# Altium PCB Science.PcbDoc (part 2 of 2)
Units mil, origin at the board's own origin, x right, y up, seen from the top; angles counter-clockwise.
Board outline 8250 x 3500 mil, 2 copper layers (Top Layer, Bottom Layer); 137 components, 126 nets, 701 pads, 227 vias.
Unrouted connection lines stored in the file: 22.
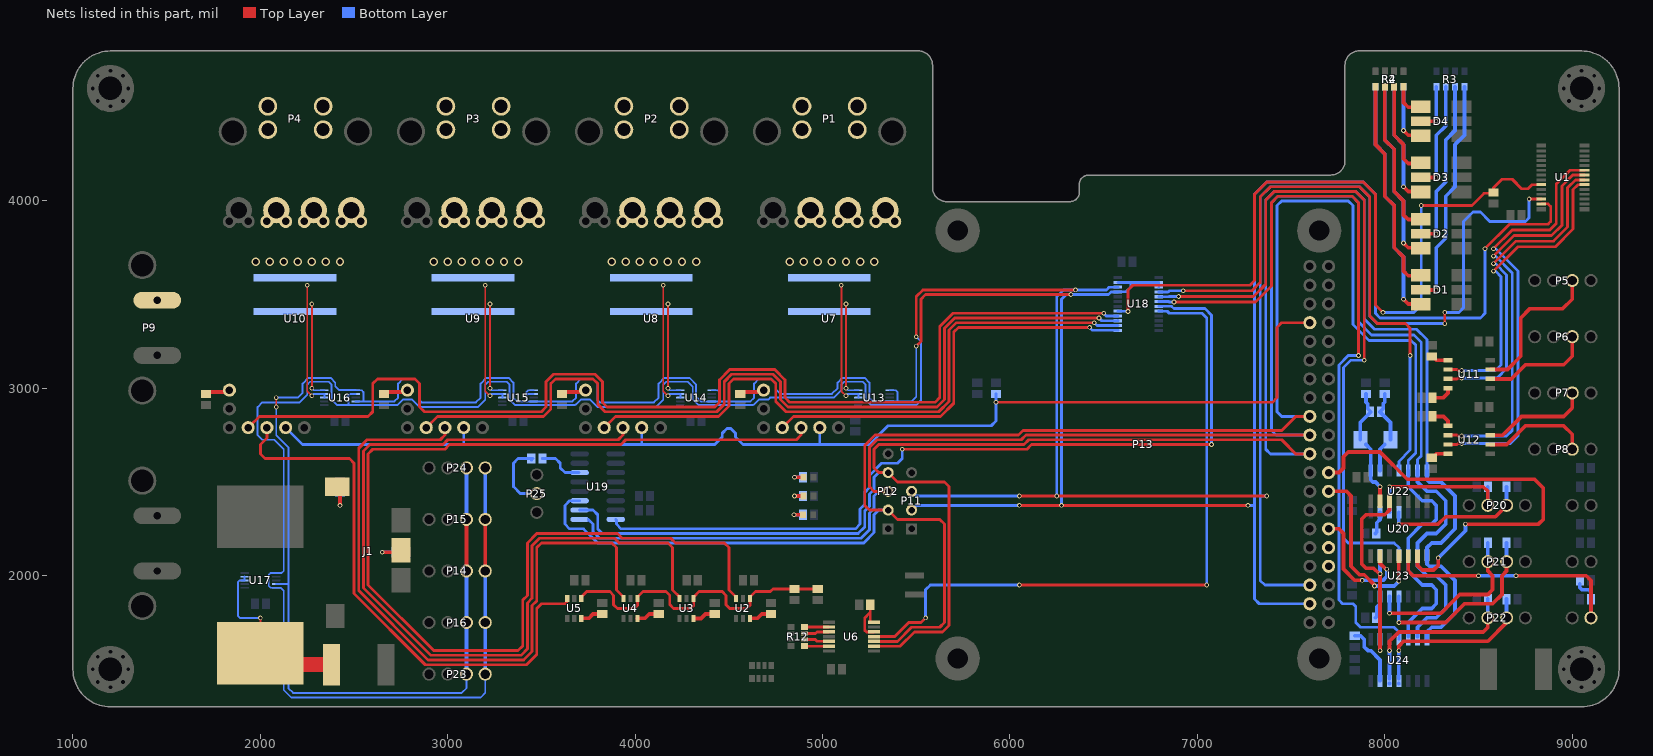
[diagram p2: the nets of this part, all layers, seen from the top]

## Via types
v1: diameter 25, hole 15, Top Layer to Bottom Layer, 184 vias
v2: diameter 45, hole 29, Top Layer to Bottom Layer, 28 vias
v3: diameter 45, hole 30, Top Layer to Bottom Layer, 11 vias
v4: diameter 25, hole 15, Top Layer to Bottom Layer, tented both sides, 2 vias
v5: diameter 70, hole 40, Top Layer to Bottom Layer, 1 vias
v6: diameter 45, hole 30, Top Layer to Bottom Layer, tented both sides, 1 vias

## Nets (pads, with @x,y where several pads share a name; then routed paths per layer and width w, separated by ;. In a path a pad name is that pad's centre, name@x,y a point inside that pad or via, vN(x,y) a via of type N, cw(c..) or ccw(c..) an arc to the next point about the centre after c; other vN are vias at no path point) (continued)
NetC19_2: C19.2 P19.2 R36.2 U20.5 | length 1472
  Top Layer w20: U20.5@8125,2075 8125,2025 8150,2000 v1(8500,2000) ; v1(8700,2000) 9075,2000 9100,1975 P19.2@9100,1775
  Bottom Layer w20: v1(8500,2000) v1(8700,2000) ; R36.2@9040,1955 9040,1936.72 9051.72,1925 9088.28,1925 9100,1913.28 C19.2@9100,1875 P19.2@9100,1775
NetC20_2: C20.2 R37.1 U22.2 Y1.2 | length 428
  Bottom Layer w20: U22.2@7975,2561.22 7975,2675 Y1.2@8000,2700 ; C20.2@8000,2970.47 8000,2925 7991.18,2916.18 7991.18,2891.18 7975,2875 7975,2873.62 8030.71,2817.91 Y1.2@8030.71,2725
NetC21_2: C21.2 R37.2 U20.13 U22.1 Y1.1 | length 617.8
  Top Layer w20: U20.13@7975,2400 v1(7975,2475)
  Bottom Layer w20: Y1.1@7869.29,2725 7869.29,2817.91 7925,2873.62 7925,2875 7908.82,2891.18 7908.82,2916.18 7900,2925 C21.2@7900,2970.47 ; Y1.1@7900,2700 7925,2675 U22.1@7925,2561.22 7925,2511.72 7936.72,2500 7950,2500 v1(7975,2475)
NetD1_4: D1.4 R2.5 | length 1106.1
  Top Layer w20: R2.5@7950,4608.66 7950,4300 8000,4250 8000,4025 8050,3975 8050,3750 8100,3700 8100,3625 8125,3600 D1.4@8150,3600
NetD1_5: D1.5 R3.5 | length 1195.8
  Top Layer w20: D1.5@8225,3525 v1(8275,3525)
  Bottom Layer w20: v1(8275,3525) 8275,3750 8325,3800 8325,4025 8375,4075 8375,4300 8425,4350 R3.5@8425,4608.66
NetD1_6: D1.6 R4.8 | length 1256.1
  Top Layer w20: v1(8100,3475) 8125,3450 D1.6@8150,3450
  Bottom Layer w20: R4.8@7950,4608.66 7950,4300 8000,4250 8000,4025 8050,3975 8050,3750 8100,3700 v1(8100,3475)
NetD2_4: D2.4 R2.6 | length 785.4
  Top Layer w20: R2.6@8000,4608.66 8000,4325 8050,4275 8050,4050 8100,4000 8100,3925 8125,3900 D2.4@8150,3900
NetD2_5: D2.5 R3.6 | length 875.1
  Top Layer w20: D2.5@8225,3825 v1(8275,3825)
  Bottom Layer w20: v1(8275,3825) 8275,4050 8325,4100 8325,4325 8375,4375 R3.6@8375,4608.66
NetD2_6: D2.6 R4.7 | length 935.4
  Top Layer w20: v1(8100,3775) 8125,3750 D2.6@8150,3750
  Bottom Layer w20: R4.7@8000,4608.66 8000,4325 8050,4275 8050,4050 8100,4000 v1(8100,3775)
NetD3_4: D3.4 R2.7 | length 464.7
  Top Layer w20: R2.7@8050,4608.66 8050,4350 8100,4300 8100,4225 8125,4200 D3.4@8150,4200
NetD3_5: D3.5 R3.7 | length 554.4
  Top Layer w20: D3.5@8225,4125 v1(8275,4125)
  Bottom Layer w20: v1(8275,4125) 8275,4350 8325,4400 R3.7@8325,4608.66
NetD3_6: D3.6 R4.6 | length 614.7
  Top Layer w20: v1(8100,4075) 8125,4050 D3.6@8150,4050
  Bottom Layer w20: R4.6@8050,4608.66 8050,4350 8100,4300 v1(8100,4075)
NetD4_4: D4.4 R2.8 | length 144
  Top Layer w20: R2.8@8100,4608.66 8100,4525 8125,4500 D4.4@8150,4500
NetD4_5: D4.5 R3.8 | length 233.7
  Top Layer w20: D4.5@8225,4425 v1(8275,4425)
  Bottom Layer w20: v1(8275,4425) R3.8@8275,4608.66
NetD4_6: D4.6 R4.5 | length 294
  Top Layer w20: v1(8100,4375) 8125,4350 D4.6@8150,4350
  Bottom Layer w20: v1(8100,4375) R4.5@8100,4608.66
NetD5_1: D5.1 R31.1 | length 100
  Top Layer w20: v1(4847.44,2325) D5.1@4894.88,2325
  Bottom Layer w20: v1(4847.44,2325) R31.1@4900,2325
NetD6_1: D6.1 R32.1 | length 97.4
  Top Layer w20: v1(4850,2425) D6.1@4897.44,2425
  Bottom Layer w20: v1(4850,2425) R32.1@4900,2425
NetD7_1: D7.1 R33.1 | length 97.4
  Top Layer w20: v1(4850,2525) D7.1@4897.44,2525
  Bottom Layer w20: v1(4850,2525) R33.1@4900,2525
NetF1_2: F1.2 R30.1 U17.8 U17.9 | length 796.1
  Top Layer w10: R30.1@2000,1745 v1(2000,1775)
  Top Layer w80: R30.1@2000,1585.83 2060.83,1525 F1.2@2375,1525
  Bottom Layer w10: U17.9@1915,1995 1915,1975.08 1915.08,1975 U17.8@1916.34,1975 1916.26,1974.92 1889.92,1974.92 1880,1965 1880,1785 1890,1775 v1(2000,1775)
NetJ1_1: J1.1 R28.2 | length 145.5
  Top Layer w20: v1(2425,2375) J1.1@2425,2450
  Bottom Layer w20: v1(2425,2375) R28.2@2425,2445.47
NetJ1_4: J1.4 R29.2 | length 145.5
  Top Layer w20: v1(2650,2125) J1.4@2725,2125
  Bottom Layer w20: v1(2650,2125) R29.2@2720.47,2125
NetP1_1: P1.1 U7.15
NetP1_2: P1.2 U7.14
NetP2_1: P2.1 U8.15
NetP2_2: P2.2 U8.14
NetP3_1: P3.1 U9.15
NetP3_2: P3.2 U9.14
NetP4_1: P4.1 U10.15
NetP4_2: P4.2 U10.14
NetP5_3: P5.3 U11.7 | length 812.9
  Top Layer w20: U11.7@8562.2,3100 8654.53,3100 8725,3170.47 8725,3375 8775,3425 8950,3425 9000,3475 P5.3@9000,3575
NetP6_3: P6.3 U11.6 | length 592.2
  Top Layer w20: U11.6@8562.2,3050 8675,3050 8750,3125 8954.53,3125 9000,3170.47 P6.3@9000,3275
NetP7_3: P7.3 U12.7 | length 577.6
  Top Layer w20: U12.7@8562.2,2750 8629.53,2750 8729.53,2850 8954.53,2850 9000,2895.47 P7.3@9000,2975
NetP8_3: P8.3 U12.6 | length 577.4
  Top Layer w20: U12.6@8562.2,2700 8650.24,2700 8750.24,2800 8954.17,2800 9000,2754.17 P8.3@9000,2675
NetP9_2: P9.2 R24.2 R25.2 R26.2 R27.2 U13.10 U14.10 U15.10 U16.10 | length 2083
  Top Layer w10: v1(2275,3000) v1(2275,3450) ; v1(3225,3000) v1(3225,3450) ; v1(4175,3000) v1(4175,3450) ; v1(5125,3000) v1(5125,3450)
  Bottom Layer w10: v1(2275,3000) 2285.63,2989.37 U16.10@2341.34,2989.37 ; v1(3225,3000) 3235.63,2989.37 U15.10@3291.34,2989.37 ; v1(4175,3000) 4185.63,2989.37 U14.10@4241.34,2989.37 ; v1(5125,3000) 5135.63,2989.37 U13.10@5191.34,2989.37
NetP20_2: P20.2 R41.1 U22.12 | length 835.4
  Top Layer w20: v1(8025,2475) 8525,2475 8550,2450 P20.2@8550,2375
  Bottom Layer w20: U22.12@8025,2350 v1(8025,2475) ; P20.2@8550,2375 R41.1@8550,2475
NetP20_3: P20.3 R44.1 U22.11 | length 780.2
  Top Layer w20: v1(8075,2275) 8285,2275 8325,2315 8590,2315 P20.3@8650,2375
  Bottom Layer w20: v1(8075,2275) U22.11@8075,2338.78 ; P20.3@8650,2375 R44.1@8650,2475
NetP21_2: P21.2 R42.1 U23.12 | length 950.9
  Top Layer w20: v1(8025,1800) 8300,1800 8400,1900 8550,1900 8575,1925 8575,2000 8550,2025 P21.2@8550,2075
  Bottom Layer w20: v1(8025,1800) U23.12@8025,1888.78 ; P21.2@8550,2075 R42.1@8550,2175
NetP21_3: P21.3 R45.1 U23.11 | length 1036.3
  Top Layer w20: v1(8075,1750) 8325,1750 8425,1850 8575,1850 8625,1900 8625,2000 8650,2025 P21.3@8650,2075
  Bottom Layer w20: v1(8075,1750) U23.11@8075,1888.78 ; P21.3@8650,2075 R45.1@8650,2175
NetP22_2: P22.2 R43.1 U24.12 | length 906.1
  Top Layer w20: v1(8025,1600) 8025,1650 8075,1700 8525,1700 8550,1725 P22.2@8550,1775
  Bottom Layer w20: U24.12@8025,1450 v1(8025,1600) ; P22.2@8550,1775 R43.1@8550,1875
NetP22_3: P22.3 R46.1 U24.11 | length 926.8
  Top Layer w20: v1(8075,1600) 8075,1625 8100,1650 8550,1650 8650,1750 P22.3@8650,1775
  Bottom Layer w20: U24.11@8075,1450 v1(8075,1600) ; P22.3@8650,1775 R46.1@8650,1875
NetP25_2: P25.2 R47.2 | length 388.5
  Bottom Layer w15: R47.2@3445.47,2615.95 R47.2@3454.53,2625 ; R47.2@3450,2625 3375,2625 3350,2600 3350,2475 3387,2438 P25.2@3475,2438
NetR1_2: R1.2 U1.23 U18.17 | length 4154.6
  Top Layer w15: v1(6630,3410) 6630,3525 6655,3550 7280,3550 7305,3575 7305,4035 7370,4100 7885,4100 7950,4035 7950,3445 v1(7990,3405) ; v1(8195,3975) 8464.78,3975 8529.94,4040.16 8575.63,4040.16 R1.2@8580,4044.53 ; R1.2@8580,4055 8580,4070 8625,4115 8680,4115 8730,4065 8764.53,4065 8785.77,4086.24 8834.47,4086.24 U1.23@8834.84,4086.61
  Bottom Layer w15: U18.17@6575.75,3411.61 6576.52,3410.85 6629.15,3410.85 v1(6630,3410) ; v1(7990,3405) 8155,3405 8195,3445 v1(8195,3975)
NetR5_1: R5.1 U2.3 | length 122.5
  Top Layer w20: U2.3@4612.4,1771.85 4612.4,1772.4 4613.23,1773.23 4653.23,1773.23 4675,1795 R5.1@4725,1795
NetR6_1: R6.1 U3.3 | length 122.2
  Top Layer w20: U3.3@4312.4,1771.85 4351.85,1771.85 4375,1795 R6.1@4425,1795
NetR7_1: R7.1 U4.3 | length 132.5
  Top Layer w20: U4.3@4012.4,1771.85 4012.4,1772.4 4013.23,1773.23 4053.23,1773.23 4075,1795 R7.1@4135,1795
NetR8_1: R8.1 U5.3 | length 122.5
  Top Layer w20: U5.3@3712.4,1771.85 3712.4,1772.4 3713.23,1773.23 3753.23,1773.23 3775,1795 R8.1@3825,1795
NetR9_2: R9.2 R11.1 U2.4 U3.4 U4.4 U5.4 | length 1653.1
  Top Layer w15: U5.4@3712.4,1878.15 3712.4,1886.02 3741.38,1915 3865,1915 3885,1895 3885,1845 3905,1825 3995,1825 4012.4,1842.4 U4.4@4012.4,1878.15 ; U4.4@4012.4,1886.02 4041.38,1915 4165,1915 4185,1895 4185,1845 4205,1825 4295,1825 4312.4,1842.4 U3.4@4312.4,1878.15 ; U3.4@4312.4,1886.02 4341.38,1915 4465,1915 4485,1895 4485,1845 4505,1825 4595,1825 4612.4,1842.4 U2.4@4612.4,1878.15 ; U2.4@4612.4,1886.02 4641.38,1915 4720.47,1915 4735,1929.53 R11.1@4850,1929.53 R9.2@4975,1929.53
NetR10_1: R10.1 U6.12 U6.14 | length 250.1
  Top Layer w15: 5250,1800 5225,1775 5225,1708.79 5233.79,1700 5273.12,1700 U6.12@5273.71,1700.59 ; R10.1@5250,1825 5254.15,1825 5254.53,1824.63 5254.53,1753.13 5255.89,1751.77 U6.14@5273.71,1751.77
NetR12_5: R12.5 U6.6 | length 129
  Top Layer w15: R12.5@4905,1625 4906.18,1623.82 U6.6@5033.55,1623.82
NetR12_6: R12.6 U6.5 | length 133.5
  Top Layer w15: R12.6@4905,1657.07 4907.19,1659.25 4960.75,1659.25 4969.82,1650.18 5032.79,1650.18 U6.5@5033.55,1649.41
NetR12_7: R12.7 U6.3 | length 133.5
  Top Layer w15: R12.7@4905,1692.93 4907.18,1690.75 4960.75,1690.75 4969.82,1699.82 5032.78,1699.82 U6.3@5033.55,1700.59
NetR12_8: R12.8 U6.2 | length 129
  Top Layer w15: R12.8@4905,1725 4905.41,1725.41 5032.79,1725.41 U6.2@5033.55,1726.18
NetR14_1: R14.1 U7.10 | length 121.8
  Top Layer w20: R14.1@4560,2969.53 4570.9,2980.43 4669.57,2980.43 U7.10@4675,2975
NetR15_1: R15.1 U8.10 | length 121.8
  Top Layer w20: R15.1@3610,2969.53 3620.91,2980.43 3719.57,2980.43 U8.10@3725,2975
NetR16_1: R16.1 U9.10 | length 121.8
  Top Layer w20: R16.1@2660,2969.53 2670.91,2980.43 2769.57,2980.43 U9.10@2775,2975
NetR19_1: R19.1 U10.10 | length 121.8
  Top Layer w20: R19.1@1710,2969.53 1720.9,2980.43 1819.57,2980.43 U10.10@1825,2975
NetR20_2: R20.2 U11.1 | length 96.3
  Top Layer w20: R20.2@8250,3170.47 8255.91,3170.47 8276.38,3150 U11.1@8337.8,3150
NetR21_2: R21.2 U11.4 | length 118.6
  Top Layer w20: R21.2@8254.53,2950 8312.8,2950 8337.8,2975 U11.4@8337.8,3000
NetR22_2: R22.2 U12.1 | length 118.6
  Top Layer w20: R22.2@8254.53,2850 8312.8,2850 8337.8,2825 U12.1@8337.8,2800
NetR23_2: R23.2 U12.4 | length 96.3
  Top Layer w20: R23.2@8250,2629.53 8255.91,2629.53 8276.38,2650 U12.4@8337.8,2650
NetR24_1: R24.1 U7.16 U13.8 U13.9 | length 690.3
  Top Layer w10: v1(5100,3550) 5100,2985 v1(5125,2960)
  Bottom Layer w10: v1(5125,2960) 5134.69,2969.69 U13.9@5191.34,2969.69 U13.8@5191.34,2950.08
  other v2: 4825,3675 4900,3675 4975,3675 5050,3675 5125,3675 5200,3675 5275,3675
NetR25_1: R25.1 U8.16 U14.8 U14.9 | length 690.3
  Top Layer w10: v1(4150,3550) 4150,2985 v1(4175,2960)
  Bottom Layer w10: v1(4175,2960) 4184.69,2969.69 U14.9@4241.34,2969.69 U14.8@4241.34,2950.08
  other v2: 3875,3675 3950,3675 4025,3675 4100,3675 4175,3675 4250,3675 4325,3675
NetR26_1: R26.1 U9.16 U15.8 U15.9 | length 690.3
  Top Layer w10: v1(3200,3550) 3200,2985 v1(3225,2960)
  Bottom Layer w10: v1(3225,2960) 3234.69,2969.69 U15.9@3291.34,2969.69 U15.8@3291.34,2950.08
  other v2: 2925,3675 3000,3675 3075,3675 3150,3675 3225,3675 3300,3675 3375,3675
NetR27_1: R27.1 U10.16 U16.8 U16.9 | length 690.3
  Top Layer w10: v1(2250,3550) 2250,2985 v1(2275,2960)
  Bottom Layer w10: v1(2275,2960) 2284.69,2969.69 U16.9@2341.34,2969.69 U16.8@2341.34,2950.08
  other v2: 1975,3675 2050,3675 2125,3675 2200,3675 2275,3675 2350,3675 2425,3675
NetR38_2: R38.2 U22.13 | length 124.1
  Bottom Layer w20: R38.2@7950,2225 7957.56,2232.56 7957.56,2282.56 7975,2300 U22.13@7975,2338.78
NetR39_2: R39.2 U23.13 | length 124.1
  Bottom Layer w20: R39.2@7950,1775 7957.56,1782.56 7957.56,1832.56 7975,1850 U23.13@7975,1888.78
NetR40_2: R40.2 U24.13 | length 323.7
  Bottom Layer w20: R40.2@7840,1679.53 7840.47,1680 7870,1680 7890,1660 7890,1620 7910,1600 7925,1600 7975,1550 U24.13@7975,1438.78
NetR47_1: R47.1 U19.6 | length 241.2
  Bottom Layer w15: R47.1@3504.53,2625 3575,2625 3600,2600 3600,2575 3625,2550 U19.6@3700,2550
NetU1_6: U1.6 U11.2 | length 1618.5
  Top Layer w15: U11.2@8337.8,3100 8385,3100 8390,3095 v1(8410,3095) ; v1(8580,3625) 8710,3755 8910,3755 9005,3850 9005,4060 9031.24,4086.24 9064.78,4086.24 U1.6@9065.16,4086.61
  Bottom Layer w15: v1(8410,3095) 8590,3095 8620,3125 8620,3595 8590,3625 v1(8580,3625)
NetU1_7: U1.7 U11.3 | length 1723.2
  Top Layer w15: U11.3@8337.8,3050 8385,3050 8390,3055 v1(8410,3055) ; v1(8580,3665) 8700,3785 8900,3785 8975,3860 8975,4070 9016.83,4111.83 9064.78,4111.83 U1.7@9065.16,4112.21
  Bottom Layer w15: v1(8410,3055) 8600,3055 8650,3105 8650,3605 8590,3665 v1(8580,3665)
NetU1_8: U1.8 U12.2 | length 2121.4
  Top Layer w15: U12.2@8337.8,2750 8385,2750 8390,2745 v1(8410,2745) ; v1(8580,3705) 8690,3815 8890,3815 8945,3870 8945,4080 9002.8,4137.8 U1.8@9065.16,4137.8
  Bottom Layer w15: v1(8410,2745) 8650,2745 8680,2775 8680,3615 8590,3705 v1(8580,3705)
NetU1_9: U1.9 U12.3 | length 2232
  Top Layer w15: U12.3@8337.8,2700 8385,2700 8390,2705 v1(8410,2705) ; v1(8580,3745) 8680,3845 8880,3845 8915,3880 8915,4090 8988.39,4163.39 U1.9@9065.16,4163.39
  Bottom Layer w15: v1(8410,2705) 8670,2705 8710,2745 8710,3625 8590,3745 v1(8580,3745)
NetU2_6: U2.6 U7.3 | length 6038.4
  Top Layer w15: U2.6@4537.6,1886.02 4500,1923.62 4500,2150 4475,2175 4215,2175 4190,2200 3930,2200 3905,2225 3475,2225 3425,2175 3425,1895 3400,1870 3400,1625 3375,1600 2925,1600 2575,1950 2575,2650 2600,2675 2985,2675 3010,2700 3925,2700 3950,2725 4860,2725 4885,2750 U7.3@4885,2790
NetU3_6: U3.6 U8.3 | length 4856
  Top Layer w15: U8.3@3935,2790 3935,2750 3910,2725 3000,2725 2975,2700 2585,2700 2550,2665 2550,1935 2910,1575 3390,1575 3425,1610 3425,1855 3450,1880 3450,2160 3490,2200 3890,2200 3915,2175 4175,2175 4200,2150 4200,1923.62 U3.6@4237.6,1886.02
NetU4_6: U4.6 U9.3 | length 3684.4
  Top Layer w15: U9.3@2985,2790 2985,2750 2960,2725 2570,2725 2525,2680 2525,1920 2895,1550 3405,1550 3450,1595 3450,1840 3475,1865 3475,2150 3500,2175 3875,2175 3900,2150 3900,1923.62 3937.6,1886.02 U4.6@3937.6,1878.15
NetU5_6: U5.6 U10.3 | length 2964.8
  Top Layer w15: U10.3@2035,2790 2035,2735 2000,2700 2000,2650 2025,2625 2475,2625 2500,2600 2500,1905 2880,1525 3420,1525 3475,1580 3475,1825 3500,1850 3626.21,1850 3635,1858.79 3635,1875.55 U5.6@3637.6,1878.15
NetU6_11: U6.11 U18.8 | length 3674
  Top Layer w15: U6.11@5273.71,1675 5385,1675 5460,1750 5525,1750 v1(5550,1775) ; v1(6050,1950) v1(7050,1950)
  Bottom Layer w15: v1(5550,1775) 5550,1925 5575,1950 v1(6050,1950) ; U18.8@6794.25,3411.61 6795.02,3410.85 6839.15,3410.85 6850,3400 7025,3400 7050,3375 v1(7050,1950)
NetU7_2: U7.2 U18.13 | length 2241.5
  Top Layer w15: U7.2@4785,2790 4845,2850 5630,2850 5700,2920 5700,3300 5725,3325 v1(6425,3325)
  Bottom Layer w15: v1(6425,3325) 6440.75,3309.25 U18.13@6575.75,3309.25
NetU8_2: U8.2 U18.14 | length 3472.5
  Top Layer w15: U8.2@3835,2790 3895,2850 4445,2850 4500,2905 4500,3025 4525,3050 4725,3050 4750,3025 4750,2930 4805,2875 5620,2875 5675,2930 5675,3310 5715,3350 v1(6450,3350)
  Bottom Layer w15: v1(6450,3350) 6465.16,3334.84 U18.14@6575.75,3334.84
NetU9_2: U9.2 U18.15 | length 4722.2
  Top Layer w15: U9.2@2885,2790 2945,2850 3510,2850 3550,2890 3550,3025 3575,3050 3775,3050 3800,3025 3800,2915 3840,2875 4435,2875 4475,2915 4475,3035 4515,3075 4735,3075 4775,3035 4775,2940 4815,2900 5610,2900 5650,2940 5650,3320 5705,3375 v1(6475,3375)
  Bottom Layer w15: v1(6475,3375) 6489.57,3360.43 U18.15@6575.75,3360.43 U18.15@6574.98,3361.2
NetU10_2: U10.2 U18.16 | length 5994.2
  Top Layer w15: U10.2@1925,2800 1945,2800 1995,2850 2575,2850 2600,2875 2600,3025 2625,3050 2825,3050 2850,3025 2850,2900 2875,2875 3500,2875 3525,2900 3525,3035 3565,3075 3785,3075 3825,3035 3825,2925 3850,2900 4425,2900 4450,2925 4450,3045 4505,3100 4745,3100 4800,3045 4800,2950 4825,2925 5600,2925 5625,2950 5625,3330 5695,3400 v1(6500,3400)
  Bottom Layer w15: v1(6500,3400) 6513.98,3386.02 U18.16@6575.75,3386.02 U18.16@6574.98,3386.79
NetU18_4: U18.4 U22.4 | length 3306.6
  Top Layer w15: v1(6925,3520) 7290,3520 7335,3565 7335,4020 7390,4075 7865,4075 7920,4020 7920,3385 7960,3345 8110,3345 8135,3320 v1(8135,3175)
  Bottom Layer w15: U18.4@6794.25,3513.98 6843.98,3513.98 ; 6845,3515 6850,3520 v1(6925,3520) ; U22.4@8075,2561.22 8075,2610 8135,2670 v1(8135,3175)
NetU18_5: U18.5 U23.4 | length 3857.8
  Top Layer w15: v1(6900,3490) 7300,3490 7365,3555 7365,4005 7410,4050 7845,4050 7890,4005 v1(7890,3150)
  Bottom Layer w15: U18.5@6795.02,3489.15 U18.5@6794.25,3488.39 6848.39,3488.39 6850,3490 v1(6900,3490) ; v1(7890,3150) 7820,3150 7780,3110 7780,2200 7805,2175 8050,2175 8075,2150 U23.4@8075,2111.22
NetU18_6: U18.6 U24.4 | length 4250.8
  Top Layer w15: v1(6875,3460) 7310,3460 7395,3545 7395,3990 7430,4025 7825,4025 7860,3990 v1(7860,3175)
  Bottom Layer w15: U18.6@6794.25,3462.8 6847.2,3462.8 6850,3460 v1(6875,3460) ; v1(7860,3175) 7805,3175 7755,3125 7755,1870 7775,1850 7830,1850 7845,1835 7845,1750 7870,1725 8050,1725 8075,1700 U24.4@8075,1661.22
NetU18_7: U18.7 U19.16 | length 4540.8
  Top Layer w15: v1(5425,2675) 6090,2675 6115,2700 v1(7075,2700)
  Bottom Layer w15: U19.16@3896.46,2300 3900,2296.45 3900,2275 3925,2250 5175,2250 5200,2275 5200,2355 5225,2380 5225,2445 5250,2470 5250,2535 5315,2600 5400,2600 5425,2625 v1(5425,2675) ; U18.7@6794.25,3437.21 6862.79,3437.21 6875,3425 7040,3425 7075,3390 v1(7075,2700)
NetU20_12: U20.12 U23.2 U24.2 | length 1134.3
  Top Layer w20: v1(7975,1600) v1(7975,2010) 7970,2010 7940,2040 7900,2040 7877.5,2062.5 7877.5,2302.5 7900,2325 8000,2325 8025,2350 U20.12@8025,2396.65
  Bottom Layer w20: v1(7975,1600) U24.2@7975,1661.22 ; v1(7975,2010) U23.2@7975,2100
PI_LIM1: P13.12 U20.2 | length 669.3
  Top Layer w20: P13.12@7700,2250 7755,2250 7780,2225 7780,2035 7840,1975 v1(7880,1975) ; U20.2@7975,2103.35 7975,2065 8005,2035 v1(8010,2035)
  Bottom Layer w20: v1(7880,1975) 7990,1975 8010,1995 v1(8010,2035)
PI_LIM2: P13.16 U20.4 | length 950.5
  Top Layer w20: P13.16@7700,2450 7795,2450 7820,2425 7820,2050 7865,2005 7890,2005 7945,1950 v1(7945,1945) ; v1(8075,1970) U20.4@8075,2103.35
  Bottom Layer w20: v1(7945,1945) 8050,1945 v1(8075,1970)
PI_LIM3: P13.18 U20.6 | length 2357.9
  Top Layer w20: P13.18@7700,2550 7755,2550 7780,2575 7780,2635 7805,2660 7975,2660 8120,2515 8798.28,2515 8845,2468.28 8845,2300 8820,2275 v1(8430,2275) ; U20.6@8175,2103.35 8175,2055 8200,2030 8260,2030 8285,2055 v1(8285,2095)
  Bottom Layer w20: v1(8285,2095) 8430,2240 v1(8430,2275)
PI_MISO: P12.3 P13.21 U19.1 U22.6 U23.6 U24.6 | length 9426.6
  Top Layer w15: P12.3@5350,2450 5275,2450 5250,2475 5250,2685 5290,2725 6060,2725 6085,2750 P13.21@7600,2750
  Bottom Layer w15: U19.1@3750,2300 3775,2275 3775,2235 3810,2200 5205,2200 5250,2245 5250,2335 5275,2360 5275,2425 5300,2450 P12.3@5350,2450 ; P13.21@7600,2750 7420,2750 7395,2775 7395,3990 7430,4025 7825,4025 7860,3990 7860,3355 7930,3285 8155,3285 8195,3245 8195,2640 8175,2620 U22.6@8175,2561.22
  Bottom Layer w20: U24.6@8175,1675 8175,1725 8225,1775 8275,1775 8325,1825 8325,1950 8275,2000 8225,2000 8175,2050 U23.6@8175,2111.22 ; U23.6@8175,2125 8175,2175 8225,2225 8275,2225 8325,2275 8325,2400 8275,2450 8225,2450 8175,2500 U22.6@8175,2561.22
PI_MOSI: P12.4 P13.19 U6.9 U19.2 U22.7 U23.7 U24.7 | length 11252.7
  Top Layer w15: U6.9@5273.71,1623.82 5413.82,1623.82 5490,1700 5640,1700 5675,1735 5675,2475 5650,2500 5400,2500 P12.4@5350,2550 5300,2550 5275,2575 5275,2675 5300,2700 6075,2700 6100,2725 7450,2725 7525,2650 P13.19@7600,2650
  Bottom Layer w15: U19.2@3703.54,2350 3703.8,2349.74 3775.26,2349.74 3800,2325 3800,2250 3825,2225 5190,2225 5225,2260 5225,2345 5250,2370 5250,2435 5275,2460 5275,2525 5300,2550 P12.4@5350,2550 ; P13.19@7600,2650 7390,2650 7365,2675 7365,4005 7410,4050 7845,4050 7890,4005 7890,3370 7945,3315 8170,3315 8225,3260 U22.7@8225,2561.22
  Bottom Layer w20: U24.7@8225,1650 8225,1700 8250,1725 8300,1725 8375,1800 8375,1975 8300,2050 8236.72,2050 8225,2061.72 8225,2150 8250,2175 8300,2175 8375,2250 8375,2425 8300,2500 8236.72,2500 8225,2511.72 U22.7@8225,2561.22
PI_RX: P13.10
PI_SCK: P12.2 P13.23 U6.10 U19.3 U22.5 U23.5 U24.5 | length 10902.1
  Top Layer w15: U6.10@5273.71,1649.41 5399.41,1649.41 5475,1725 5625,1725 5650,1750 5650,2275 5625,2300 5400,2300 P12.2@5350,2350 5250,2350 5225,2375 5225,2695 5280,2750 6045,2750 6070,2775 7450,2775 7525,2850 P13.23@7600,2850
  Bottom Layer w15: U19.3@3703.54,2400 3650,2400 3625,2375 3625,2275 3650,2250 3725,2250 3800,2175 5220,2175 5275,2230 5275,2325 5300,2350 P12.2@5350,2350 ; P13.23@7600,2850 7450,2850 7425,2875 7425,3975 7450,4000 7805,4000 7830,3975 7830,3340 7915,3255 8140,3255 8165,3230 8165,2655 8125,2615 U22.5@8125,2561.22
  Bottom Layer w20: U24.5@8125,1675 8125,1750 8200,1825 8250,1825 8275,1850 8275,1925 8250,1950 8200,1950 8125,2025 U23.5@8125,2111.22 ; U23.5@8125,2125 8125,2200 8200,2275 8250,2275 8275,2300 8275,2375 8250,2400 8200,2400 8125,2475 U22.5@8125,2561.22
PI_SCL: P11.3 P13.5 P14.4 P15.4 P16.4 P23.4 P24.4 U1.26 U13.5 U14.5 U15.5 U16.2 U16.5 U17.1 U17.5 U18.22 | length 18493
  Top Layer w15: v1(5500,3275) 5500,3490 5535,3525 v1(6350,3525) ; v1(6050,2425) v1(6250,2425) v1(7370,2425) ; v1(8320,3345) v1(8320,3405) ; v1(8770,4010) 8770.16,4009.84 U1.26@8834.84,4009.84
  Top Layer w20: P14.4@3200,2025 P15.4@3200,2300
  Bottom Layer w10: 2479.31,2910.69 2508.58,2910.55 U16.5@2508.66,2910.63 2730.63,2910.63 2760,2940 2810,2940 2850,2900 3160,2900 3200,2940 3200,3020 3215,3035 3315,3035 3330,3020 3330,2940 3360,2910 U15.5@3460,2910 ; U16.2@2508.58,2969.61 2479.61,2969.61 2470,2960 2470,2910 ; U16.5@2510,2910 2470,2910 ; P23.4@3200,1475 3200,1375 3175,1350 2165,1350 2125,1390 2125,1920 2109.45,1935.55 U17.5@2083.66,1935.63 U17.5@2083.66,1935.63 2083.58,1935.71 2054.29,1935.71 2045,1945 2045,2005 2054.29,2014.29 2083.58,2014.29 U17.1@2083.66,2014.37 U17.1@2083.66,2014.37 2114.45,2014.45 2125,2025 2125,2675 2075,2725 2010,2725 1985,2750 1985,2900 2010,2925 2210,2925 2250,2965 2250,3020 2265,3035 2365,3035 2380,3020 2380,2940 2410,2910 2470,2910 ; U15.5@3458.66,2910.63 3680,2910.63 ; 3682.5,2912.5 3710,2940 3760,2940 3800,2900 4110,2900 4150,2940 4150,3020 4165,3035 4280,3035 4307.5,3007.5 4307.5,2942.5 4340,2910 U14.5@4410,2910 ; U14.5@4408.66,2910.63 4630,2910 ; 4632.5,2912.5 4660,2940 4710,2940 4720,2950 5060,2950 5100,2990 5100,3020 5115,3035 5215,3035 5230,3020 5230,2940 5260,2910 U13.5@5360,2910 ; U13.5@5358.66,2910.63 U13.5@5358.66,2910.63 5389.45,2910.55 5390,2910 5500,2910 5525,2935 5525,3250 v1(5500,3275)
  Bottom Layer w15: P11.3@5475,2450 5500,2425 ; 5505,2425 v1(6050,2425) ; v1(6250,2425) 6250,3490 6285,3525 v1(6350,3525) 6515,3525 6529.57,3539.57 U18.22@6575.75,3539.57 ; v1(7370,2425) 7335,2425 ; P13.5@7600,1950 7360,1950 7335,1975 7335,2425 ; v1(8320,3345) 7960,3345 7920,3385 7920,4020 7865,4075 7390,4075 7335,4020 7335,2425 ; v1(8320,3405) 8395,3405 8420,3430 8420,3890 8470,3940 8510,3940 8560,3890 8750,3890 8770,3910 v1(8770,4010)
  Bottom Layer w20: P23.4@3200,1475 P16.4@3200,1750 P14.4@3200,2025 ; P15.4@3200,2300 P24.4@3200,2575
PI_SDA: P11.2 P13.3 P14.3 P15.3 P16.3 P23.3 P24.3 U1.27 U13.1 U13.4 U14.1 U14.4 U15.1 U15.2 U15.4 U16.1 U16.4 U17.4 U18.2 U18.3 U18.21 U18.23 | length 19092.8
  Top Layer w10: v1(2085,2900) v1(2085,2950)
  Top Layer w15: v1(5500,3225) 5525,3250 5525,3475 5550,3500 v1(6325,3500) ; v1(6050,2375) v1(6275,2375) v1(7270,2375) ; v1(8535,3745) 8665,3875 8870,3875 8885,3890 8885,3970 8870.75,3984.25 U1.27@8834.84,3984.25
  Top Layer w20: P14.3@3100,2025 P15.3@3100,2300
  Bottom Layer w10: U17.4@2083.66,1955.32 2150,1955.32 ; v1(2085,2900) 2085,2750 2150,2685 2150,1955.32 ; v1(2085,2950) 2200,2950 2225,2975 2225,3025 2255,3055 2375,3055 2400,3030 2400,3010 2420,2990 U16.1@2510,2990 ; U16.4@2508.66,2930.32 2508.74,2930.39 2550,2930.39 ; U16.1@2508.74,2989.29 2540.71,2989.29 2550,2980 2550,2930.39 ; P23.3@3100,1475 3100,1400 3075,1375 2175,1375 2150,1400 2150,1955.32 ; 3420,2970 3420,2980 3429.29,2989.29 3458.58,2989.29 U15.1@3458.66,2989.37 ; 3429.61,2930.39 3458.58,2930.39 U15.4@3458.66,2930.32 ; 3430,2930 3420,2930 ; U15.2@3458.66,2969.69 3420,2969.69 ; U15.4@3458.74,2930.39 3665.39,2930.39 3685,2950 3685,3025 3710,3050 3775,3050 3800,3025 3800,2935 3810,2925 4100,2925 4125,2950 4125,3025 4155,3055 4290,3055 4325,3020 4325,2955 4350,2930 U14.4@4410,2930 ; U14.4@4408.66,2930.32 4408.74,2930.39 4450,2930.39 ; U14.1@4408.66,2989.37 4408.74,2989.29 4440.71,2989.29 4450,2980 4450,2930.39 ; U13.1@5358.66,2989.37 5358.74,2989.29 5390.71,2989.29 5400,2980 5400,2930.24 ; U13.4@5358.74,2930.39 U13.4@5358.66,2930.32 5358.74,2930.24 5400,2930.24 ; U13.4@5360,2930 5270,2930 5250,2950 5250,3030 5225,3055 5105,3055 5080,3030 5080,3000 5050,2970 4775,2970 4750,2995 4750,3025 4725,3050 4660,3050 4635,3025 4635,2950 4615.39,2930.39 4450,2930.39 ; v1(5500,3225) 5500,2955 5475.24,2930.24 5400,2930.24 ; 2550,2930.39 2695,2930.39 2695.39,2930 2715,2930 2735,2950 2735,3025 2760,3050 2825,3050 2850,3025 2850,2935 2860,2925 3150,2925 3175,2950 3175,3025 3205,3055 3325,3055 3350,3030 3350,2950 3370,2930 3420,2930 ; 3420,2930 3420,2940 ; 3420,2940 3420,2969.69 ; 3420,2940 3420.31,2940.32 3420,2969.69
  Bottom Layer w15: P11.2@5475,2350 5500,2375 v1(6050,2375) ; v1(6275,2375) 6275,3475 6300,3500 v1(6325,3500) 6525,3500 6538.21,3513.21 6574.98,3513.21 U18.21@6575.75,3513.98 6576.52,3514.74 6619.74,3514.74 6645,3540 6645,3565 ; U18.23@6575.75,3565.16 U18.2@6794.25,3565.16 ; U18.3@6794.25,3539.57 U18.2@6794.25,3563.43 ; v1(7270,2375) 7305,2375 ; P13.3@7600,1850 7330,1850 7305,1875 7305,2375 ; v1(8535,3745) 8535,3400 8510,3375 7975,3375 7950,3400 7950,4035 7885,4100 7370,4100 7305,4035 7305,2375
  Bottom Layer w20: P23.3@3100,1475 P16.3@3100,1750 P14.3@3100,2025 ; P15.3@3100,2300 P24.3@3100,2575
PI_TX: P13.8
SLEEP: P13.33 R17.2 U7.4 U8.4 U9.4 U10.4 | length 6459.1
  Top Layer w15: v1(5925,2925) 7400,2925 7425,2950 7425,3325 7450,3350 P13.33@7600,3350
  Bottom Layer w15: U10.4@2135,2790 2225,2700 3085,2700 ; U9.4@3085,2790 3085,2700 ; U8.4@4035,2790 4035,2700 ; U7.4@4985,2790 4985,2700 ; R17.2@5925,2970.47 v1(5925,2925) 5925,2825 5900,2800 5350,2800 5250,2700 4985,2700 ; 3085,2700 4035,2700 ; 4035,2700 4425,2700 4465,2740 4465,2760 4490,2785 4510,2785 4535,2760 4535,2740 4575,2700 4985,2700
pads on no net: Designator1. Designator2. Designator3. Designator4. P1. P2. P3. P4. P9. P10. P13. P13.11 P13.13 P13.15 P13.22 P13.24 P13.26 P13.27 P13.28 P13.29 P13.31 P13.32 P13.35 P13.36 P13.37 P13.38 P13.40 U6.1 U6.8 U13.3 U14.3 U15.3 U16.3 U17.3 U18.1 U18.9 U18.10 U18.11 U18.18 U18.19 U18.20 U19.4 U19.7 U19.8 U19.9 U20.8 U20.9 U20.10 U20.11 U22.8 U22.9 U22.10 U23.1 U23.8 U23.9 U23.10 U24.1 U24.8 U24.9 U24.10

## Polygon pours and split planes (outlines as drawn)
GND on Top Layer (solid, remove dead copper, pour order 80): 1375,1325 1350,1350 1350,1575 1275,1650 1050,1650 1025,1675 1025,4425 1050,4450 1275,4450 1350,4525 1350,4750 1375,4775 5525,4775 5550,4750 5550,4000 5575,3975 6350,3975 6400,4025 6400,4075 6425,4100 7750,4100 7825,4175 7825,4725 7875,4775 8875,4775 8900,4750 8900,4525 8975,4450 9200,4450 9225,4425 9225,1675 9200,1650 8975,1650 8900,1575 8900,1350 8875,1325
AGND on Top Layer "Top Layer-AGND" (solid, pour order 78): 3500,2150 3500,1550 4400,1550 4400,1350 5500,1350 5500,2150
no net on Top Layer "Top Layer-No Net 1" (solid, pour order 50): 5185,4200
NetR24_1 on Top Layer "Bottom Layer-NetR26_1" (solid, pour order 48): 4775,3510 4775,3825 5250,3825 5250,4030 5425,4030 5425,3510
NetP1_1 on Top Layer "Top Layer-NetP3_1" (solid, pour order 46): 5045,3850 5230,3850 5230,4050 5500,4050 5500,4750 5045,4750
NetP1_2 on Top Layer "Top Layer-NetP3_2" (solid, pour order 44): 5025,3850 4840,3850 4840,4050 4570,4050 4570,4750 5025,4750
no net on Top Layer "Top Layer-No Net 1" (solid, pour order 42): 4235,4200
NetR25_1 on Top Layer "Bottom Layer-NetR26_1" (solid, pour order 40): 3825,3510 3825,3825 4300,3825 4300,4030 4475,4030 4475,3510
NetP2_1 on Top Layer "Top Layer-NetP3_1" (solid, pour order 38): 4095,3850 4280,3850 4280,4050 4550,4050 4550,4750 4095,4750
NetP2_2 on Top Layer "Top Layer-NetP3_2" (solid, pour order 36): 4075,3850 3890,3850 3890,4050 3620,4050 3620,4750 4075,4750
no net on Top Layer "Top Layer-No Net 1" (solid, pour order 34): 2335,4200
NetR27_1 on Top Layer "Bottom Layer-NetR26_1" (solid, pour order 32): 1925,3510 1925,3825 2400,3825 2400,4030 2575,4030 2575,3510
NetP4_1 on Top Layer "Top Layer-NetP3_1" (solid, pour order 30): 2195,3850 2380,3850 2380,4050 2650,4050 2650,4750 2195,4750
NetP4_2 on Top Layer "Top Layer-NetP3_2" (solid, pour order 28): 2175,3850 1990,3850 1990,4050 1720,4050 1720,4750 2175,4750
NetP3_2 on Top Layer "Top Layer-NetP3_2" (solid, pour order 26): 3125,3850 2940,3850 2940,4050 2670,4050 2670,4750 3125,4750
NetP3_1 on Top Layer "Top Layer-NetP3_1" (solid, pour order 24): 3145,3850 3330,3850 3330,4050 3600,4050 3600,4750 3145,4750
NetR26_1 on Top Layer "Bottom Layer-NetR26_1" (solid, pour order 22): 2875,3510 2875,3825 3350,3825 3350,4030 3525,4030 3525,3510
24V_IN on Top Layer "Top Layer-24V_IN" (solid, pour order 18): 500,3150
no net on Top Layer "Top Layer-No Net" (solid, pour order 10): 3388.23,4200
no net on Top Layer "Top Layer-No Net 1" (solid, pour order 8): 3285,4200
GND on Bottom Layer (solid, remove dead copper, pour order 82): 1375,1325 1350,1350 1350,1575 1275,1650 1050,1650 1025,1675 1025,4425 1050,4450 1275,4450 1350,4525 1350,4750 1375,4775 5525,4775 5550,4750 5550,4000 5575,3975 6350,3975 6400,4025 6400,4075 6425,4100 7750,4100 7825,4175 7825,4750 7850,4775 8875,4775 8900,4750 8900,4525 8975,4450 9025,4450 9200,4450 9225,4425 9225,1675 9200,1650 8975,1650 8900,1575 8900,1525 8900,1350 8875,1325
AGND on Bottom Layer "Bottom Layer-AGND" (solid, pour order 76): 3500,2150 3500,1550 4400,1550 4400,1350 5500,1350 5500,2150
AGND on Bottom Layer "Bottom Layer-AGND 1" (solid, pour order 74): 5450,1250
NetP9_2 on Bottom Layer "Bottom Layer-NetP9_2" (solid, pour order 70): 1050,3325 1050,3825 1900,3825 1900,3485 5425,3485 5425,3075 1675,3075 1675,3325
NetR24_1 on Bottom Layer "Bottom Layer-NetR26_1" (solid, pour order 68): 4775,3510 4775,3825 5250,3825 5250,4030 5425,4030 5425,3510
NetP1_1 on Bottom Layer "Top Layer-NetP3_1" (solid, pour order 66): 5045,3850 5230,3850 5230,4050 5500,4050 5500,4750 5045,4750
NetP1_2 on Bottom Layer "Top Layer-NetP3_2" (solid, pour order 64): 5025,3850 4840,3850 4840,4050 4570,4050 4570,4750 5025,4750
NetR25_1 on Bottom Layer "Bottom Layer-NetR26_1" (solid, pour order 62): 3825,3510 3825,3825 4300,3825 4300,4030 4475,4030 4475,3510
NetP2_1 on Bottom Layer "Top Layer-NetP3_1" (solid, pour order 60): 4095,3850 4280,3850 4280,4050 4550,4050 4550,4750 4095,4750
NetP2_2 on Bottom Layer "Top Layer-NetP3_2" (solid, pour order 58): 4075,3850 3890,3850 3890,4050 3620,4050 3620,4750 4075,4750
NetR27_1 on Bottom Layer "Bottom Layer-NetR26_1" (solid, pour order 56): 1925,3510 1925,3825 2400,3825 2400,4030 2575,4030 2575,3510
NetP4_1 on Bottom Layer "Top Layer-NetP3_1" (solid, pour order 54): 2195,3850 2380,3850 2380,4050 2650,4050 2650,4750 2195,4750
NetP4_2 on Bottom Layer "Top Layer-NetP3_2" (solid, pour order 52): 2175,3850 1990,3850 1990,4050 1720,4050 1720,4750 2175,4750
NetP3_2 on Bottom Layer "Top Layer-NetP3_2" (solid, pour order 6): 3125,3850 2940,3850 2940,4050 2670,4050 2670,4750 3125,4750
NetP3_1 on Bottom Layer "Top Layer-NetP3_1" (solid, pour order 0): 3145,3850 3330,3850 3330,4050 3600,4050 3600,4750 3145,4750
24V_IN on Bottom Layer "Bottom Layer-24V_IN" (solid, pour order 14): 550,2600
24V_IN on Bottom Layer "Bottom Layer-24V_IN 1" (solid, pour order 12): 1050,2200 1050,3300 1650,3300 1650,2200
no net on Bottom Layer "Bottom Layer-No Net" (solid, pour order 4): 3600,3925.1
NetR26_1 on Bottom Layer "Bottom Layer-NetR26_1" (solid, pour order 2): 2875,3510 2875,3825 3350,3825 3350,4030 3525,4030 3525,3510

## Silkscreen, mask and mechanical layers (free items; w line width, h text height)
Top Overlay:
  text "Spare" at 1765,4660 h80
  text "Turntable" at 2715,4660 h80
  text "Rail" at 3665,4660 h80
  text "Drill" at 4615,4660 h80
  text "SCARLET / LOGO" at 8500,4550 h60
  text "ROBOTICS / LOGO" at 1150,4175 h60
  text "Motor / Switch" at 1150,3775 h80
  text "SRV1" at 9240,3445 h60 r90
  text "SRV2" at 9240,3145 h60 r90
  text "SRV3" at 9240,2845 h60 r90
  text "3V3" at 5300,2600 h30 r90
  text "SRV4" at 9240,2545 h60 r90
  text "MO" at 5300,2500 h30 r90
  text "3V3" at 5575,2500 h30 r90
  text "3.3V" at 5025,2475 h60
  text "GAS" at 3350,2450 h60 r90
  text "MI" at 5300,2400 h30 r90
  text "SCL" at 5575,2400 h30 r90
  text "5V" at 5025,2375 h60
  text "24V" at 1200,2300 h80 r90
  text "SCK" at 5300,2300 h30 r90
  text "SDA" at 5575,2300 h30 r90
  text "MOIST" at 3700,2288 h60 r90
  text "24V" at 5025,2275 h60
  text "ENC1" at 8390,2245 h60 r90
  text "LIM1" at 9240,2245 h60 r90
  text "GND" at 5300,2200 h30 r90
  text "GND" at 5575,2200 h30 r90
  text "UV" at 3350,2175 h60 r90
  text "Science Main Board / Husky Robotics 2019 / Cai Biesinger   v1" at 3700,2150 h150
  text "Camera connector?" at 5925,2125 h60
  text "ENC2" at 8390,1945 h60 r90
  text "LIM2" at 9240,1945 h60 r90
  text "ATMO" at 3350,1900 h60 r90
  text "GND" at 1200,1750 h80 r90
  text "ENC3" at 8390,1645 h60 r90
  text "LIM3" at 9240,1645 h60 r90
  text "DIST" at 3350,1625 h60 r90
  text "Power / Input" at 1300,1450 h80
  text "ALTIUM LOGO" at 3600,1400 h60
  text "FTIR" at 3350,1350 h60 r90
  text "HEIGHT LIMITATION ON THIS SIDE" at 900,300 h600
Mechanical 1:
  the board outline again, w10